# EAGLE board Sudden_XCVR_IF_Module (EAGLE 9.2.2)

Size 109.2 x 150.8 mm. Coordinates in mm from the lower left corner, seen from the top.
Outline: 0,0 109.2,0 109.2,150.8 0,150.8 0,0
Copper layers (1*16): Top 0.035mm / dielectric 1.5mm / Bottom 0.035mm
Design rules "default": minimum track width 6mil, minimum drill 0.35mm, track to track 6mil, track to pad 6mil, pad to pad 6mil, via to via 6mil, smd to smd 6mil, copper to edge 40mil, drill to drill 6mil, minimum pad ring 10mil, minimum via ring 8mil, stop-mask expansion 4mil, vias tented up to drill 0mil, thermal gap 10mil
Net classes: 0 default: width 0.813 mm, clearance 1.016 mm; 1 jim: width 0.889 mm, clearance 0.889 mm

## Footprints (pad centres in the part's own frame; a part is rotated, then mirrored left to right if it is on the bottom)
CAP-MEDIUM-MUPPET = smd 3.048 x 3.048: 1 -3.009,0; 2 3.009,0
CAP-POLARIZED = drill 0 pad 3.175 square: 1 2.647,0 | drill 0 pad 3.175: 2 -2.901,0
PAD-SQUARE = drill 0 pad 5.08 square: PAD 0,0
DIL08 = smd 1.27 x 3.81: 1 -3.81,-5.08; 2 -1.27,-5.08; 3 1.27,-5.08; 4 3.81,-5.08; 5 3.81,5.08; 6 1.27,5.08; 7 -1.27,5.08; 8 -3.81,5.08
MOLDED-CHOKE = drill 1.1 pad 3 octagon: 1 -3.75,0; 2 3.75,0
INDUCTOR_TAPPED = smd 3.81 x 1.905: P$1 -3.805,0; P$2 3.805,0 | smd 1.905 x 3.81: P$3 -0.254,3.561
INDUCTOR_TAPPED_MIRRORED = smd 3.81 x 1.905: P$1 -3.805,0; P$2 3.805,0 | smd 1.905 x 3.81: P$3 0,-3.551
POWER-IN-PAD = drill 0 pad 5.08 square: VCC 0,0
CRYSTAL-FILTER = drill 0.813: 1 -2.413,-7.62; 2 2.413,-7.62; 3 0,7.874

## Placement (x,y rotation side)
C1  10nF  [CAP-MEDIUM-MUPPET]  -17.78,50.8 0 top  (outside the outline)
C2  100nF  [CAP-MEDIUM-MUPPET]  -27.94,50.8 0 top  (outside the outline)
C3  10nF  [CAP-MEDIUM-MUPPET]  -38.1,50.8 0 top  (outside the outline)
C4  10nF  [CAP-MEDIUM-MUPPET]  -48.26,50.8 0 top  (outside the outline)
C5  100nF  [CAP-MEDIUM-MUPPET]  -58.42,50.8 0 top  (outside the outline)
C6  10nF  [CAP-MEDIUM-MUPPET]  -17.78,58.42 0 top  (outside the outline)
C7  100nF  [CAP-MEDIUM-MUPPET]  -27.94,58.42 0 top  (outside the outline)
C8  10nF  [CAP-MEDIUM-MUPPET]  -38.1,58.42 0 top  (outside the outline)
C9  10nF  [CAP-MEDIUM-MUPPET]  -48.26,58.42 0 top  (outside the outline)
C10  100nF  [CAP-MEDIUM-MUPPET]  -58.42,58.42 0 top  (outside the outline)
C11  10uF  [CAP-POLARIZED]  -17.78,33.02 0 top  (outside the outline)
C12  10uF  [CAP-POLARIZED]  -27.94,33.02 0 top  (outside the outline)
H1  MOUNT-PAD-SQUARE4.5  [PAD-SQUARE]  -57.15,6.35 0 top  (outside the outline)
H2  [PAD-SQUARE]  -17.78,24.13 0 top  (outside the outline)
H3  [PAD-SQUARE]  -27.94,24.13 0 top  (outside the outline)
H4  MOUNT-PAD-SQUARE4.5  [PAD-SQUARE]  -38.1,24.13 0 top  (outside the outline)
IC1  [DIL08]  81.28,121.92 180 top
IC2  [DIL08]  26.67,121.92 180 top
L1  1000uH/1mH molded choke  [MOLDED-CHOKE]  -34.29,66.04 0 top  (outside the outline)
L2  1000uH/1mH molded choke  [MOLDED-CHOKE]  -60.96,66.04 0 top  (outside the outline)
L3  INDUCTOR-TAPPED  [INDUCTOR_TAPPED]  71.12,124.46 90 top
L5  INDUCTOR-TAPPED-MIRROREDINDUCTOR_TAPPED_MIRRORED  [INDUCTOR_TAPPED_MIRRORED]  36.83,124.46 90 top
P+1  +6V  [POWER-IN-PAD]  -16.51,72.39 0 top  (outside the outline)
P+2  +6V  [POWER-IN-PAD]  -22.86,72.39 0 top  (outside the outline)
Q1  [CRYSTAL-FILTER]  54.61,139.7 0 top

## Library data of the parts
C1-C10 = jim_muppet_parts; PROD_ID: JIM-CAP Large SMT
C11 C12 = jim_muppet_parts; PROD_ID: CAP-08439
H1-H4 IC1 IC2 L3 L5 P+1 P+2 = jim_muppet_parts
L1 L2 Q1 = jim_muppet_parts; OC_FARNELL: unknown; OC_NEWARK: unknown

## Nets
+5V: C11.1 C12.1 L1.2 L2.2 P+1.VCC P+2.VCC
GND: C2.1 C5.2 C7.1 C10.2 C11.2 C12.2 IC1.3 IC2.3 L3.P$2 L5.P$2 Q1.3
N$1: C5.1 IC1.8 L1.1
N$2 [jim]: C4.2 IC1.6
N$3: C3.2 IC1.5
N$4: C3.1 L3.P$1
N$5: C1.2 IC1.1
N$6: C8.1 H3.PAD
N$7: C2.2 IC1.2
N$9: C10.1 IC2.8 L2.1
N$11: C8.2 IC2.6
N$12: C9.2 IC2.5
N$13: C6.2 IC2.1
N$14: C6.1 L5.P$1
N$15: C7.2 IC2.2
N$16: L3.P$3 Q1.2
N$17: L5.P$3 Q1.1
N$19: C4.1 H2.PAD
N$20: C9.1 H4.PAD
N$22: C1.1 H1.PAD

## Tracks (layer width: path | path; a pad name or v marks a point on that pad's centre or on a via)
+5V  (5 unrouted)
GND  (10 unrouted)
N$1  (2 unrouted)
N$2  (1 unrouted)
N$3  (1 unrouted)
N$4  (1 unrouted)
N$5  (1 unrouted)
N$6  (1 unrouted)
N$7  (1 unrouted)
N$9  (2 unrouted)
N$11  (1 unrouted)
N$12  (1 unrouted)
N$13  (1 unrouted)
N$14  (1 unrouted)
N$15  (1 unrouted)
N$16  (1 unrouted)
N$17  (1 unrouted)
N$19  (1 unrouted)
N$20  (1 unrouted)
N$22  (1 unrouted)
(copper drawn outside any net)
  shapes: Top area x3